# EAGLE board INPUT DEVICE (EAGLE 7.2.0)
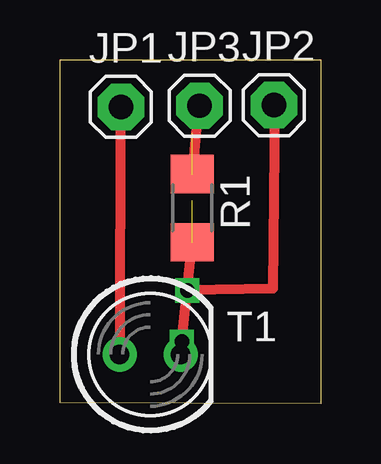
[diagram p0: board, top side]
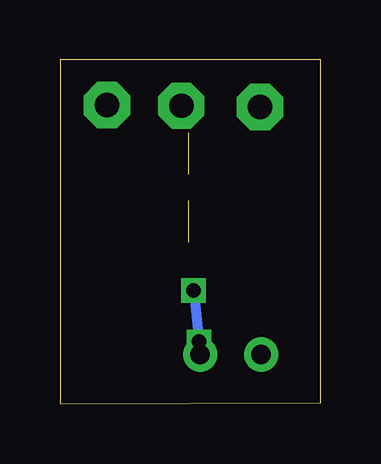
[diagram p1: board, bottom side, seen from below]

Size 10.87 x 14.33 mm. Coordinates in mm from the lower left corner, seen from the top.
Outline: 0,14.33 10.87,14.33 10.87,0 0,0.05 0,14.33
Copper layers (1*16): Top 0.035mm / dielectric 1.5mm / Bottom 0.035mm
Design rules "default *": minimum track width 10mil, minimum drill 24mil, track to track 16mil, track to pad 16mil, pad to pad 16mil, via to via 16mil, smd to smd 16mil, copper to edge 16mil, drill to drill 8mil, minimum pad ring 10mil, minimum via ring 8mil, stop-mask expansion 4mil, vias tented up to drill 0mil, thermal gap 10mil

## Footprints (pad centres in the part's own frame; a part is rotated, then mirrored left to right if it is on the bottom)
1X01 = drill 1.016 pad 1.93 octagon: 1 0,0
1206 = smd 1.6 x 1.803: 1 -1.422,0; 2 1.422,0
5MM = drill 0.813 pad 1.422: IN -1.27,0; OUT 1.27,0

## Placement (x,y rotation side)
JP1  [1X01]  2.54,12.37 0 top
JP2  [1X01]  8.92,12.45 0 top
JP3  [1X01]  5.82,12.42 0 top
R1  499  [1206]  5.51,8.15 270 top
T1  [5MM]  3.76,2.06 0 top

## Library data of the parts
JP1-JP3 = 01_adafruit
R1 = ng
T1 = 01_ng

## Nets
+5V: JP1.1 T1.IN
N$1: JP3.1 R1.1
N$2: JP2.1 R1.2 T1.OUT

## Tracks (layer width: path | path; a pad name or v marks a point on that pad's centre or on a via)
+5V  (via drill 0.6)
  Top 0.406: v2.52,12.5 T1.IN
  Bottom 0.406: JP1.1 v2.52,12.5
N$1  (via drill 0.6)  (1 unrouted)
  Top 0.406: v5.77,12.47 R1.1
  Bottom 0.406: JP3.1 v5.77,12.47
N$2  (via drill 0.6)  (1 unrouted)
  Top 0.406: v8.94,12.55 8.87,4.8 v5.31,4.72 | v5.08,2.59 R1.2
  Bottom 0.406: JP2.1 v8.94,12.55 | v5.31,4.72 T1.OUT v5.08,2.59